# Altium PCB Datn.PcbDoc
Units mm, origin at the board's own origin, x right, y up, seen from the top; angles counter-clockwise.
Board outline 97.92 x 94.62 mm, 2 copper layers (Top Layer, Bottom Layer); 13 components, 17 nets, 83 pads, 0 vias.
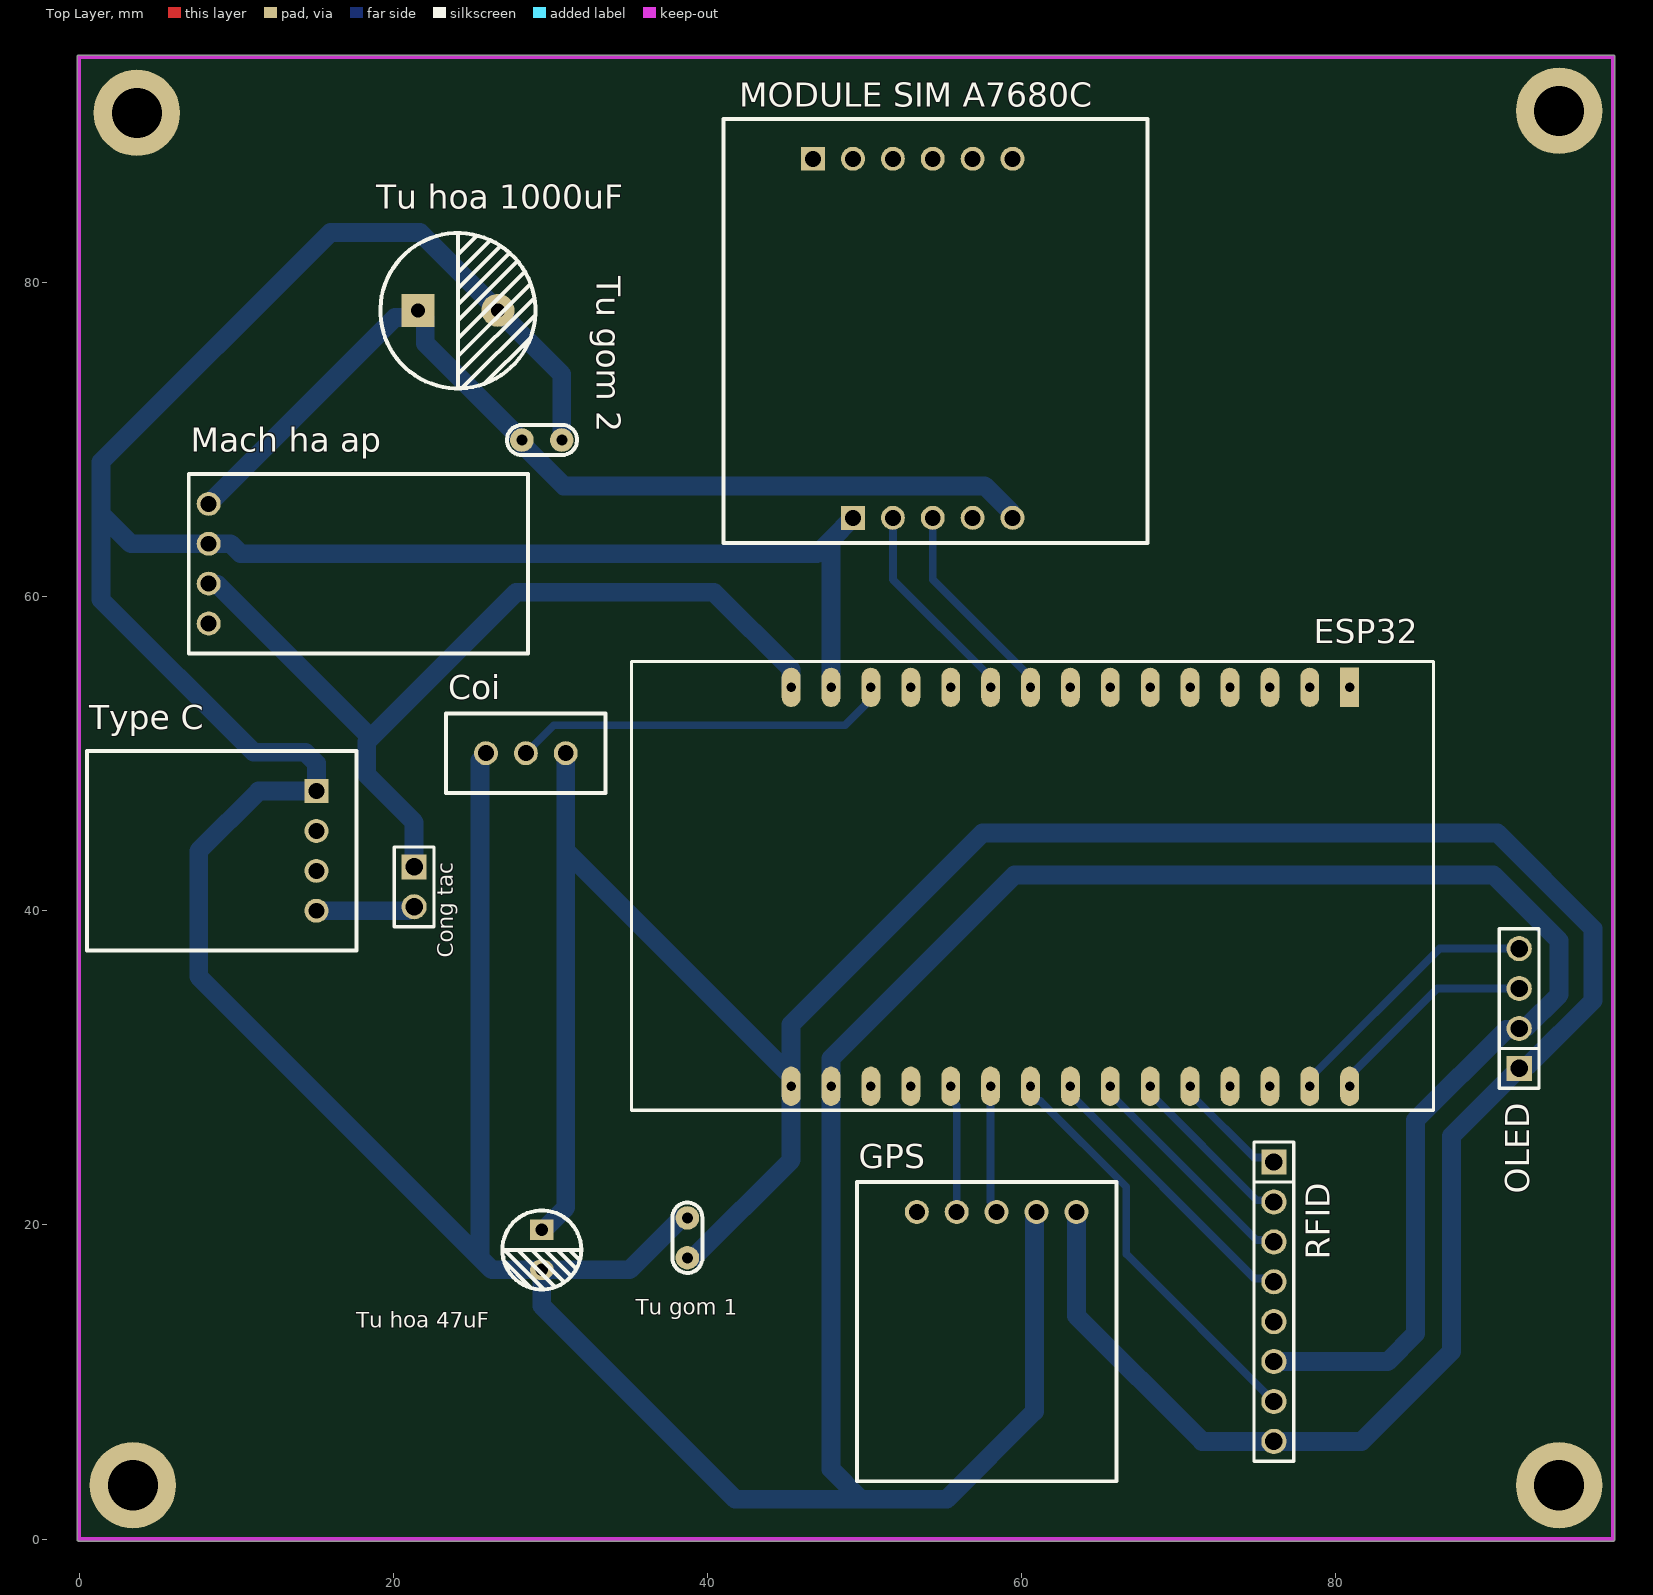
[diagram p0: Top Layer view]
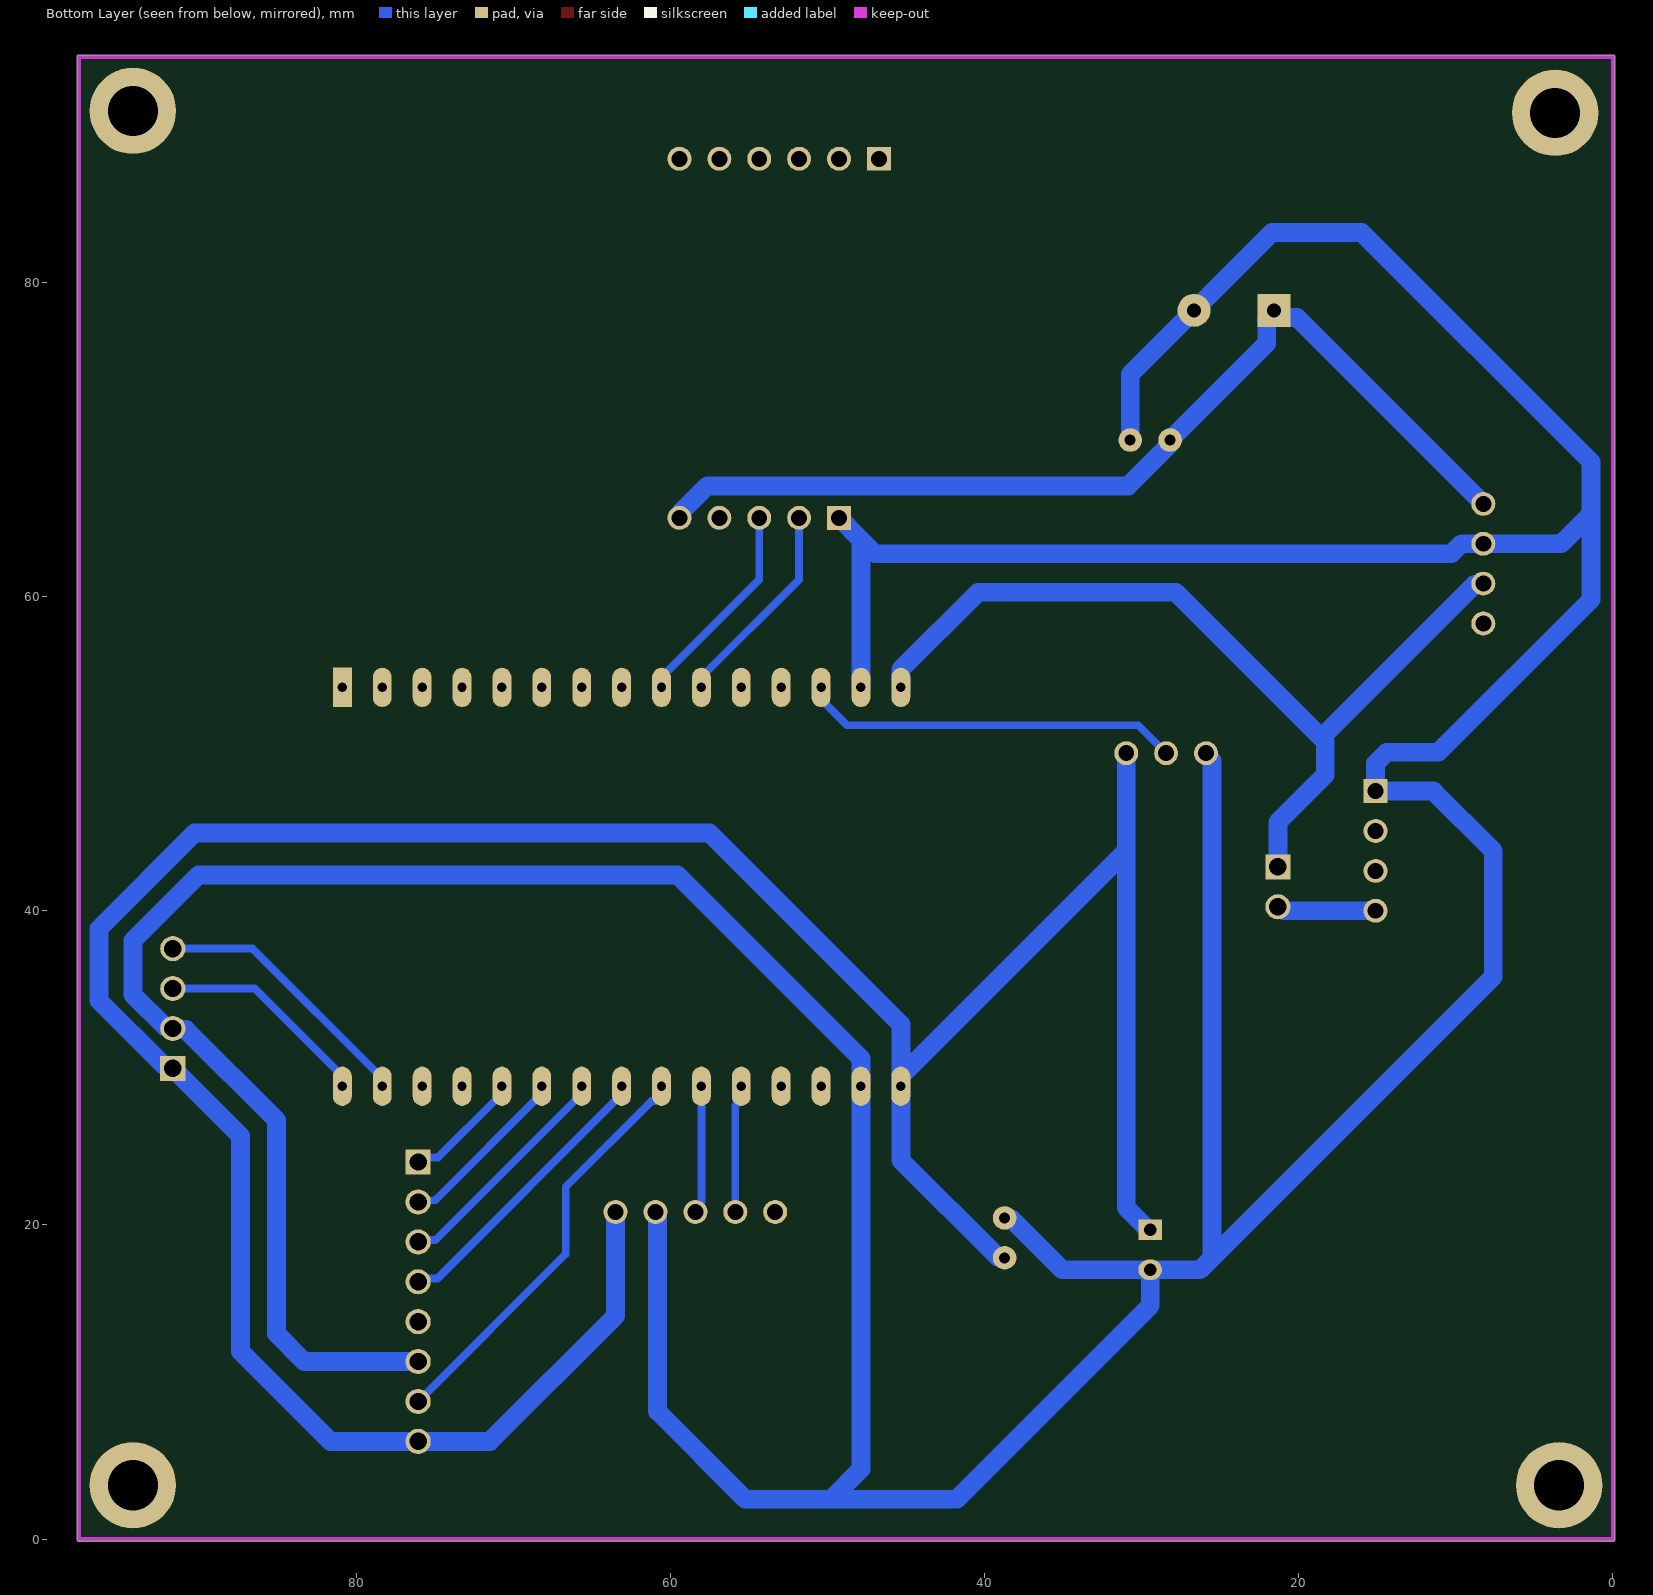
[diagram p1: Bottom Layer view, seen from below]
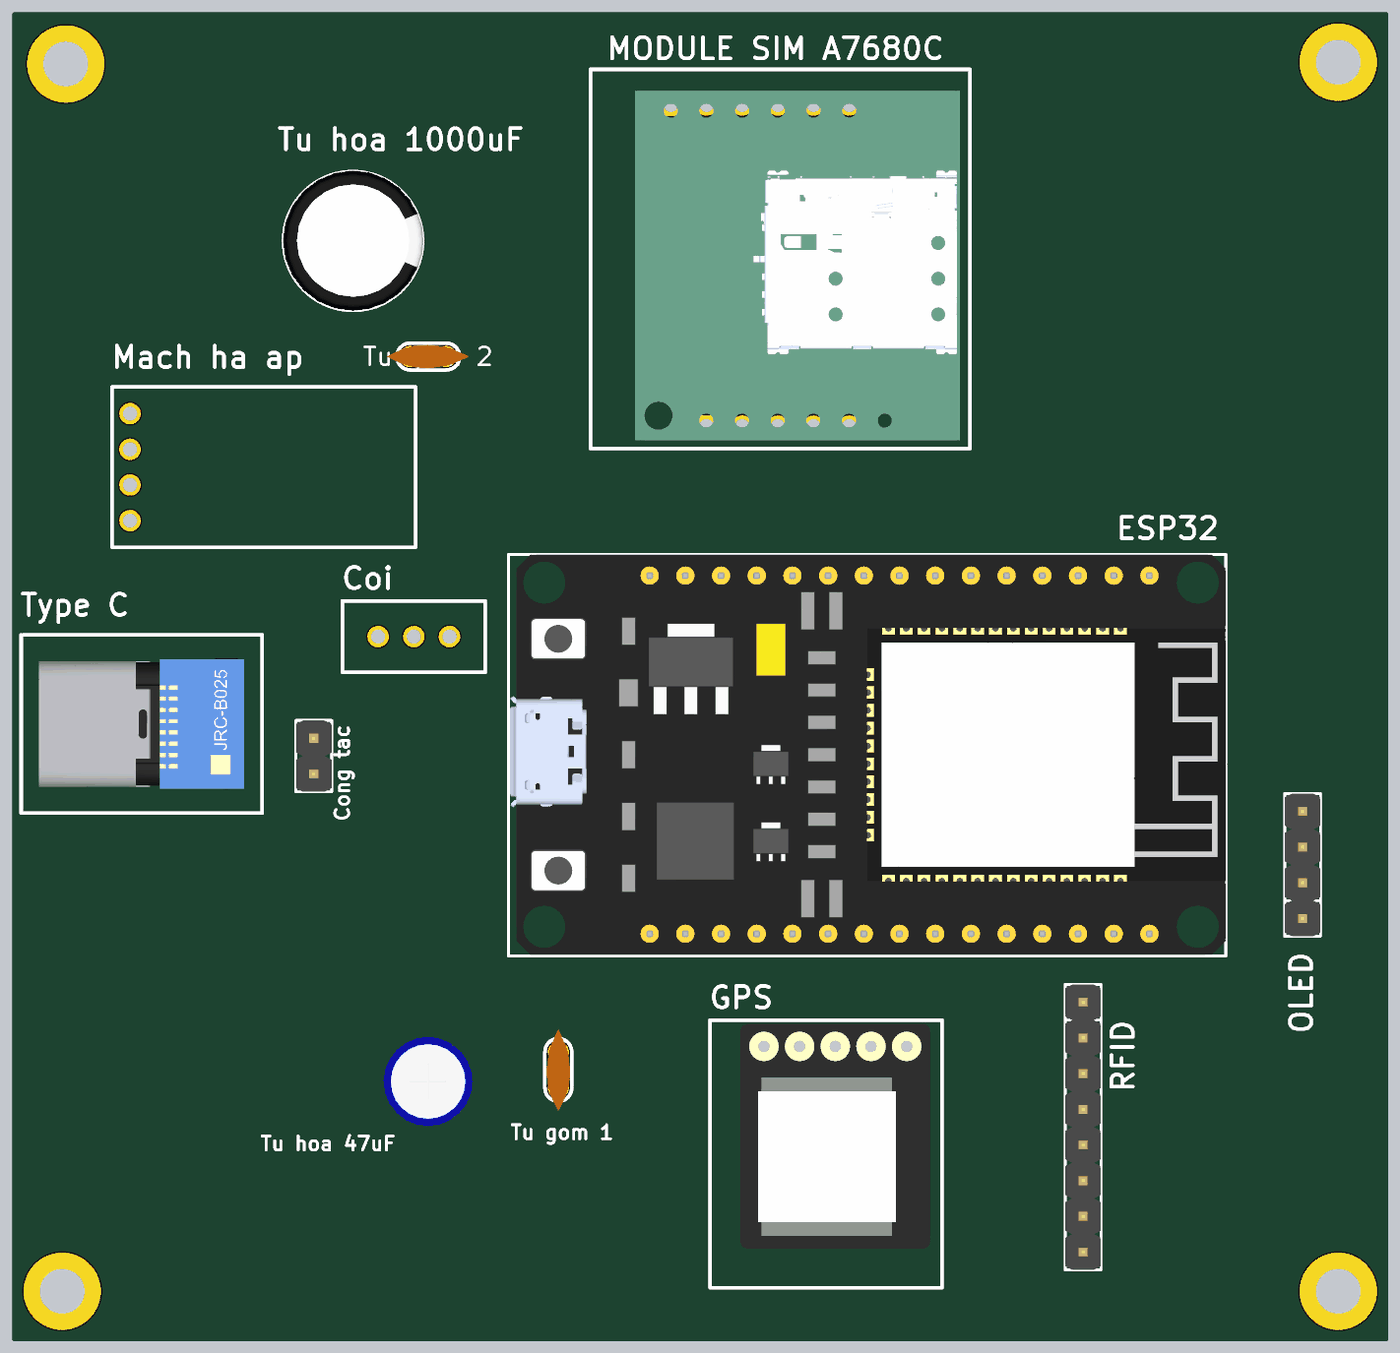
[diagram p2: 3D render of the assembled board from above, using the file's embedded part models]

## Layer stack, top to bottom
Top Solder: solder mask 0.0102, Solder Resist, Dk 3.5
Top Layer: signal copper 0.0356
Dielectric 1: dielectric 0.32, FR-4, Dk 4.8
Bottom Layer: signal copper 0.0356
Bottom Solder: solder mask 0.0102, Solder Resist, Dk 3.5

## Board outline
-0.127,0 -0.127,94.361 cw(c0,94.361) 0,94.488 97.663,94.488 cw(c97.663,94.361) 97.79,94.361 97.79,0 cw(c97.663,0) 97.663,-0.127 0,-0.127 cw(c0,0)

## Design rules (kind name [scope] priority, off if disabled: settings)
Clearance [All] p1: gap=0.4 ignorepadtopadclearanceinfootprint=FALSE
PolygonConnect [All] p1: connectstyle=Relief reliefconductorwidth=0.254 reliefentries=4 polygonreliefangle="90 Angle" airgapwidth=0.254
RoutingVias [All] p1: holewidth=0.711 width=1.27 viastyle="Through Hole" minholewidth=0.711 minwidth=1.27 maxholewidth=0.711 maxwidth=1.27
SolderMaskExpansion [All] p1: expansion=0.102 istentingtop=FALSE
Width 3.3V [InNet('3.3V')] p1: maxlimit=1.6 minlimit=0.5 preferedwidth=1.2
Width 4V [InNet('4V_SIM')] p2: maxlimit=1.6 minlimit=0.5 preferedwidth=1.2
Width 5V [InNet('5V')] p3: maxlimit=1.6 minlimit=0.5 preferedwidth=1.2
Width GND [InNet('GND')] p4: maxlimit=1.6 minlimit=0.5 preferedwidth=1.2
Width [All] p5: maxlimit=1.2 minlimit=0.3 preferedwidth=0.5
30 further rules are at their usual default settings.

## Classes and differential pairs
component class Datn: Coi "Cong tac" ESP32 GPS "Mach ha ap" OLED RFID "Tu gom 1" "Tu gom 2" "Tu hoa 47uF" "Tu hoa 1000uF" "Type C"

## Components (designator, comment, footprint, x,y, rotation, side; value= is the part's Value field where it differs from the comment)
Coi "Coi" Coi 25.908,50.038 r90 top
"Cong tac" "Cong tac" "JP 1x2 DT" 21.336,42.799 r270 top
ESP32 "ESP32 DEVKIT" "ESP32 WROOM 32 KIT" 80.899,54.229 r270 top
GPS "GPS" GPS 63.5,19.558 r180 top
"Mach ha ap" "Mach ha ap" "Mach ha ap" 8.255,65.913 r0 top
OLED "OLED" "JP 1x4 DT" 91.694,29.972 r90 top
RFID "RFID" "JP 1x8 DT" 76.073,24.003 r270 top
Sim "Module_SIM_A7680C" Footprint_Module_SIM_A7680C 56.261,87.884 r270 top
"Tu gom 1" "104" "tu gom" 38.735,19.177 r270 top
"Tu gom 2" "104" "tu gom" 29.464,69.977 r180 top
"Tu hoa 47uF" "47uF" "tu hoa 5mm" 29.464,18.415 r270 top
"Tu hoa 1000uF" "1000uF" "tu hoa 10mm" 24.13,78.232 r0 top
"Type C" "Type C" "TYPE C" 15.113,40.005 r90 top

## Footprints (in the part's own frame and the unit in brackets; to place one, negate y for a bottom-side part, rotate by r counter-clockwise, add the part's x,y. Pads: shape width x height; smd on the part's side, far side on the other; paste and mask are expansions set on the pad)
Coi [mil]
  round 60 hole 40: 1(0,0) 2(0,-100) 3(0,-200)
  silkscreen extent -100,-300 100,100
"ESP32 WROOM 32 KIT" [mm]
  rect 2.5x1.2 hole 0.6: 1(0,0)
  oval 2.5x1.2 hole 0.6: 2(0,-2.54) 3(0,-5.08) 4(0,-7.62) 5(0,-10.16) 6(0,-12.7) 7(0,-15.24) 8(0,-17.78) 9(0,-20.32) 10(0,-22.86) 11(0,-25.4) 12(0,-27.94) 13(0,-30.48) 14(0,-33.02) 15(0,-35.56) 16(25.4,-35.56) 17(25.4,-33.02) 18(25.4,-30.48) 19(25.4,-27.94) 20(25.4,-25.4) 21(25.4,-22.86) 22(25.4,-20.32) 23(25.4,-17.78) 24(25.4,-15.24) 25(25.4,-12.7) 26(25.4,-10.16) 27(25.4,-7.62) 28(25.4,-5.08) 29(25.4,-2.54) 30(25.4,0)
  silkscreen extent -1.65,-45.72 26.92,5.33, body extent -1.65,-45.6 26.85,5.33, height 10.49
Footprint_Module_SIM_A7680C [mil]
  round 60 hole 40: 1(0,125) 2(0,25) 3(0,-75) 4(0,-175) 5(0,-275) 7(900,125) 8(900,25) 9(900,-75) 10(900,-175)
  rect 60x60 hole 40: 6(0,-375) 11(900,-275)
  silkscreen extent -100,-600 963,463, body extent -41,-475 941,439, height 66
GPS [mil]
  round 60 hole 40: 1(0,-50) 2(100,-50) 3(200,-50) 4(300,-50) 5(400,-50)
  silkscreen extent -100,-125 550,625, body extent -67,-114 545,595, height 79
"JP 1x2 DT" [mm] "2 pins, 1 row, straight, gold plating"
  rect 1.6x1.6 hole 1.1: 1(0,0)
  round 1.6 hole 1.1: 2(2.54,0)
  silkscreen extent -1.27,-1.27 3.81,1.27, body extent -1.27,-1.27 3.81,1.27, height 8.54
"JP 1x4 DT" [mm] "4 pins, 1 row, straight, gold plating"
  rect 1.6x1.6 hole 1.1: 1(0,0)
  round 1.6 hole 1.1: 2(2.54,0) 3(5.08,0) 4(7.62,0)
  silkscreen extent -1.27,-1.27 8.89,1.27, body extent -1.27,-1.27 8.89,1.27, height 8.54
"JP 1x8 DT" [mm] "8 pins, 1 row, straight, gold plating"
  rect 1.6x1.6 hole 1.1: 1(0,0)
  round 1.6 hole 1.1: 2(2.54,0) 3(5.08,0) 4(7.62,0) 5(10.16,0) 6(12.7,0) 7(15.24,0) 8(17.78,0)
  silkscreen extent -1.27,-1.27 19.05,1.27, body extent -1.27,-1.27 19.05,1.27, height 8.54
"Mach ha ap" [mil]
  round 60 hole 40: 1(0,0) 2(0,-100) 3(0,-200) 4(0,-300)
  silkscreen extent -50,-375 800,75
"tu gom" [mm] "Tu gom mini"
  round 1.5 hole 0.7: 1(-1.27,0) 2(1.27,0)
  silkscreen extent -2.25,-0.97 2.22,0.97, body extent -2.92,-0.85 2.92,0.85, height 6.12
"tu hoa 5mm" [mm]
  rect 1.3x1.5 hole 0.8: 1(-1.27,0)
  oval 1.3x1.5 hole 0.8: 2(1.27,0)
  silkscreen extent -2.51,-2.51 2.51,2.51, body extent -3.12,-3.18 3.23,3.18, height 14.55
"tu hoa 10mm" [mm]
  rect 2.1x2.1 hole 0.9: 1(-2.54,0)
  round 2.1 hole 0.9: 2(2.54,0)
  silkscreen extent -4.95,-4.96 4.93,4.92, body extent -5,-5 4.97,5, height 20.01
"TYPE C" [mil]
  round 60 hole 40: 1(0,0) 2(100,0) 3(200,0)
  rect 60x60 hole 40: 4(300,0)
  silkscreen extent -100,-100 400,575, body extent -31,-50 331,525, height 62

## Part data
"Cong tac": library part "JP 1x2 2.54 Duc Thang", "Cắm", Chung_Loai=Cắm, Don_Vi=Con, Ma_Hang=MH000903, Ten_Linh_Kien="Jump Đơn Đực 2.54MM 1x40P Thẳng 11MM"
ESP32: library part "ESP32 WROOM 32 KIT"
OLED: library part "JP 1x4 2.54 Duc Thang", "Cắm", Chung_Loai=Cắm, Don_Vi=Con, Ma_Hang=MH000903, Ten_Linh_Kien="Jump Đơn Đực 2.54MM 1x40P Thẳng 11MM"
RFID: library part "JP 1x8 2.54 Duc Thang", "Cắm", Chung_Loai=Cắm, Don_Vi=Con, Ma_Hang=MH000903, Ten_Linh_Kien="Jump Đơn Đực 2.54MM 1x40P Thẳng 11MM"
"Tu gom 1" "Tu gom 2": library part "Tu gom 104 50V", "Cắm", Chung_Loai=Cắm, Don_Vi=Con, Ma_Hang=MH004761, So_Chan=2, Ten_Linh_Kien="Tụ gốm 104 100nF 50V"
"Tu hoa 47uF": library part "Tu Hoa 47uF 25V 5x8", "Cắm", Chung_Loai=Cắm, Don_Vi=Con, Ma_Hang=MH006860, So_Chan=2, Ten_Linh_Kien="Tụ Hóa 47uF 25V"
"Tu hoa 1000uF": library part "Tu Hoa 6.8uF 400V 10x17", "Cắm", Chung_Loai=Cắm, Don_Vi=Con, Ma_Hang=MH003745, So_Chan=2, Ten_Linh_Kien="Tụ Hóa 6.8uF 400V 10x17MM"
"Type C": library part Component_1

## Free pads (board coordinates)
  round 5.5 hole 3.2: 1(3.683,90.805) 2(94.234,90.932) 3(3.429,3.429) 4(94.234,3.429)

## Nets (pads, with @x,y where several pads share a name; then routed paths per layer and width w, separated by ;. In a path a pad name is that pad's centre, name@x,y a point inside that pad or via, vN(x,y) a via of type N, cw(c..) or ccw(c..) an arc to the next point about the centre after c; other vN are vias at no path point)
3.3V: "Tu gom 1.2" "Tu hoa 47uF.1" Coi.3 ESP32.16 GPS.1 OLED.1 RFID.8 | length 194.8
  Bottom Layer w1.2: 29.464,19.685 29.514,19.735 29.614,19.735 30.988,21.109 30.988,43.83 ; Coi.3 30.988,43.83 ; 38.735,17.907 38.792,17.964 39.173,17.964 45.339,24.13 ESP32.16 ESP32.16@45.339,29.479 ; GPS.1 63.5,14.224 71.501,6.223 RFID.8 81.661,6.223 87.376,11.938 87.376,25.654 91.894,30.172 92.275,30.172 96.393,34.29 96.393,38.862 90.297,44.958 57.531,44.958 45.339,32.766 ESP32.16@45.339,29.479 ; 30.988,43.83 ESP32.16@45.339,29.479
4V_SIM: "Mach ha ap.1" "Tu gom 2.2" "Tu hoa 1000uF.1" Sim.7 | length 63
  Bottom Layer w1.2: 8.255,65.913 20.124,77.782 21.14,77.782 21.59,78.232 22.04,77.782 22.04,76.131 28.251,69.92 28.251,69.666 30.861,67.056 57.658,67.056 59.374,65.34 59.374,65.086 Sim.7
5V: "Cong tac.1" "Mach ha ap.3" ESP32.15 | length 57.7
  Bottom Layer w1.2: 8.255,60.833 8.317,60.771 8.825,60.771 18.574,51.022 ; 21.336,42.799 21.336,45.635 18.32,48.652 18.32,50.768 27.839,60.287 40.424,60.287 45.339,55.372 ESP32.15
BUZZER: Coi.2 ESP32.13 | length 24.2
  Bottom Layer w0.5: Coi.2 30.226,51.816 48.768,51.816 50.419,53.467 ESP32.13
GND: "Mach ha ap.2" "Tu gom 1.1" "Tu gom 2.1" "Tu hoa 47uF.2" "Tu hoa 1000uF.2" "Type C.4" Coi.1 ESP32.14 ESP32.17 GPS.2 OLED.2 RFID.6 Sim.11 | length 395.3
  Bottom Layer w1.2: Coi.1 25.908,49.95 25.527,49.569 25.527,17.907 ; 30.734,69.977 30.734,74.168 26.67,78.232 21.717,83.185 16.002,83.185 1.397,68.58 1.397,65.278 ; 38.735,20.447 38.678,20.39 38.297,20.39 35.052,17.145 29.464,17.145 ; ESP32.14 47.879,63.627 ; Sim.11 47.879,63.627 ; GPS.2@60.898,20.678 60.898,20.537 60.833,20.472 60.833,8.128 55.245,2.54 49.784,2.54 ; RFID.6 83.312,11.303 85.09,13.081 85.09,26.67 90.855,32.435 OLED.2@91.617,32.435 ; OLED.2 91.771,32.589 92.152,32.589 94.234,34.671 94.234,38.1 90.043,42.291 59.563,42.291 47.879,30.607 ESP32.17 47.879,4.445 49.784,2.54 ; 1.397,65.278 1.397,59.817 11.115,50.099 14.41,50.099 15.113,49.396 15.113,47.625 11.43,47.625 7.62,43.815 7.62,35.814 25.527,17.907 ; 1.397,65.278 3.302,63.373 8.255,63.373 9.652,63.373 10.287,62.738 46.99,62.738 47.879,63.627 ; 25.527,17.907 26.289,17.145 29.464,17.145 ; 29.464,17.145 29.464,14.859 41.783,2.54 49.784,2.54
GPS_RX: ESP32.20 GPS.4 | length 8.2
  Bottom Layer w0.5: ESP32.20 55.499,27.99 55.88,27.609 GPS.4
GPS_TX: ESP32.21 GPS.3 | length 8.2
  Bottom Layer w0.5: ESP32.21 58.039,21.486 58.42,21.105 GPS.3
I2C_SCK: ESP32.30 OLED.3 | length 13.8
  Bottom Layer w0.5: ESP32.30 80.899,29.479 86.472,35.052 OLED.3
I2C_SDA: ESP32.29 OLED.4 | length 17.3
  Bottom Layer w0.5: ESP32.29 78.359,29.337 86.614,37.592 OLED.4
"NetCong tac_2": "Cong tac.2" "Type C.1" | length 6.3
  Bottom Layer w1.2: 15.113,40.005 20.974,40.005 21.228,40.259 21.336,40.259
RFID_MISO: ESP32.23 RFID.4 | length 18.4
  Bottom Layer w0.5: ESP32.23 63.119,28.321 74.847,16.593 75.863,16.593 RFID.4
RFID_MOSI: ESP32.24 RFID.3 | length 14.8
  Bottom Layer w0.5: ESP32.24 65.659,28.368 65.982,28.045 74.993,19.035 75.961,19.035 RFID.3
RFID_RST: ESP32.22 RFID.7 | length 26.6
  Bottom Layer w0.5: ESP32.22 60.579,28.368 61.05,27.898 61.207,27.898 66.675,22.429 66.675,18.161 RFID.7
RFID_SCK: ESP32.25 RFID.2 | length 11.2
  Bottom Layer w0.5: ESP32.25 68.199,28.368 74.993,21.575 75.961,21.575 RFID.2
RFID_SDA: ESP32.26 RFID.1 | length 7.6
  Bottom Layer w0.5: ESP32.26 70.739,28.368 71.062,28.045 74.816,24.292 75.784,24.292 RFID.1
SIM_RX: ESP32.9 Sim.9 | length 13.4
  Bottom Layer w0.5: Sim.9 54.356,61.102 60.579,54.879 ESP32.9
SIM_TX: ESP32.10 Sim.10 | length 13.4
  Bottom Layer w0.5: Sim.10 51.816,61.102 58.039,54.879 ESP32.10
pads on no net: "Mach ha ap.4" "Type C.2" "Type C.3" ESP32.1 ESP32.2 ESP32.3 ESP32.4 ESP32.5 ESP32.6 ESP32.7 ESP32.8 ESP32.11 ESP32.12 ESP32.18 ESP32.19 ESP32.27 ESP32.28 GPS.5 RFID.5 Sim.1 Sim.2 Sim.3 Sim.4 Sim.5 Sim.6 Sim.8

## Keep-outs
Keep-Out Layer:
  lines w0.254: 0,0 0,94.361 97.663,94.361 97.663,0 0,0

## Text inside footprints (layer, text, board x,y; h text height)
Sim: Top Overlay "MODULE SIM A7680C" at 42.037,91.186 h1.52